# Altium PCB PCB.PcbDoc
Units mm, origin at the board's own origin, x right, y up, seen from the top; angles counter-clockwise.
Board outline 22.45 x 34 mm, 4 copper layers (Top Layer, Signal Layer 1, Signal Layer 2, Bottom Layer), stack 0.778 mm thick; 20 components, 8 nets, 60 pads, 29 vias.
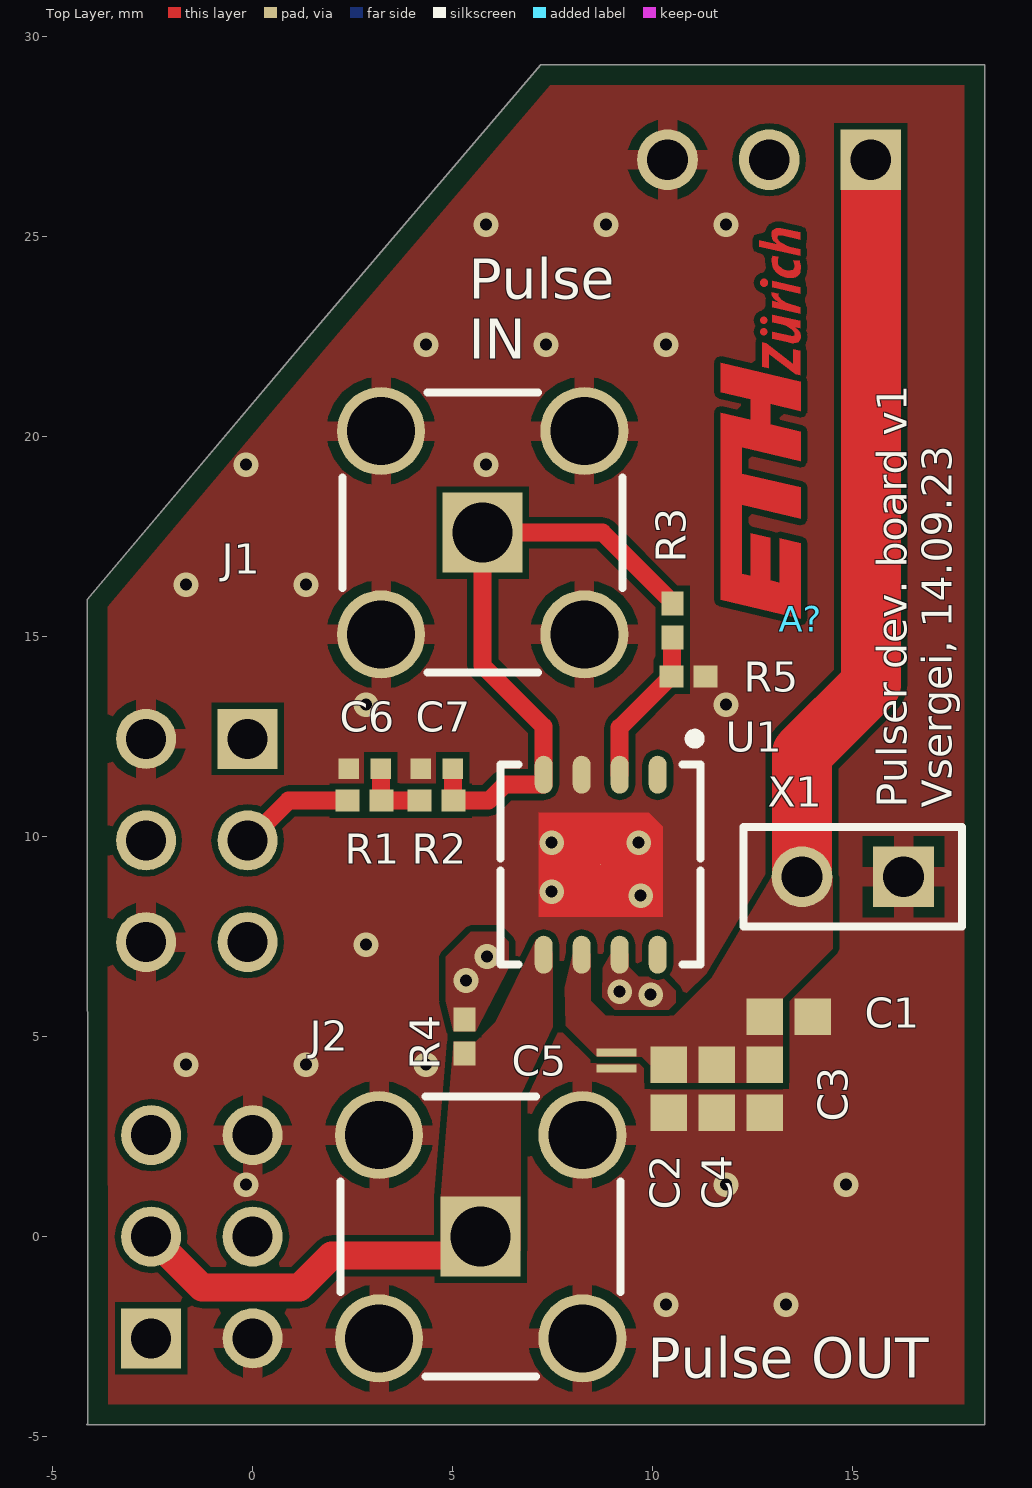
[diagram p0: Top Layer view]
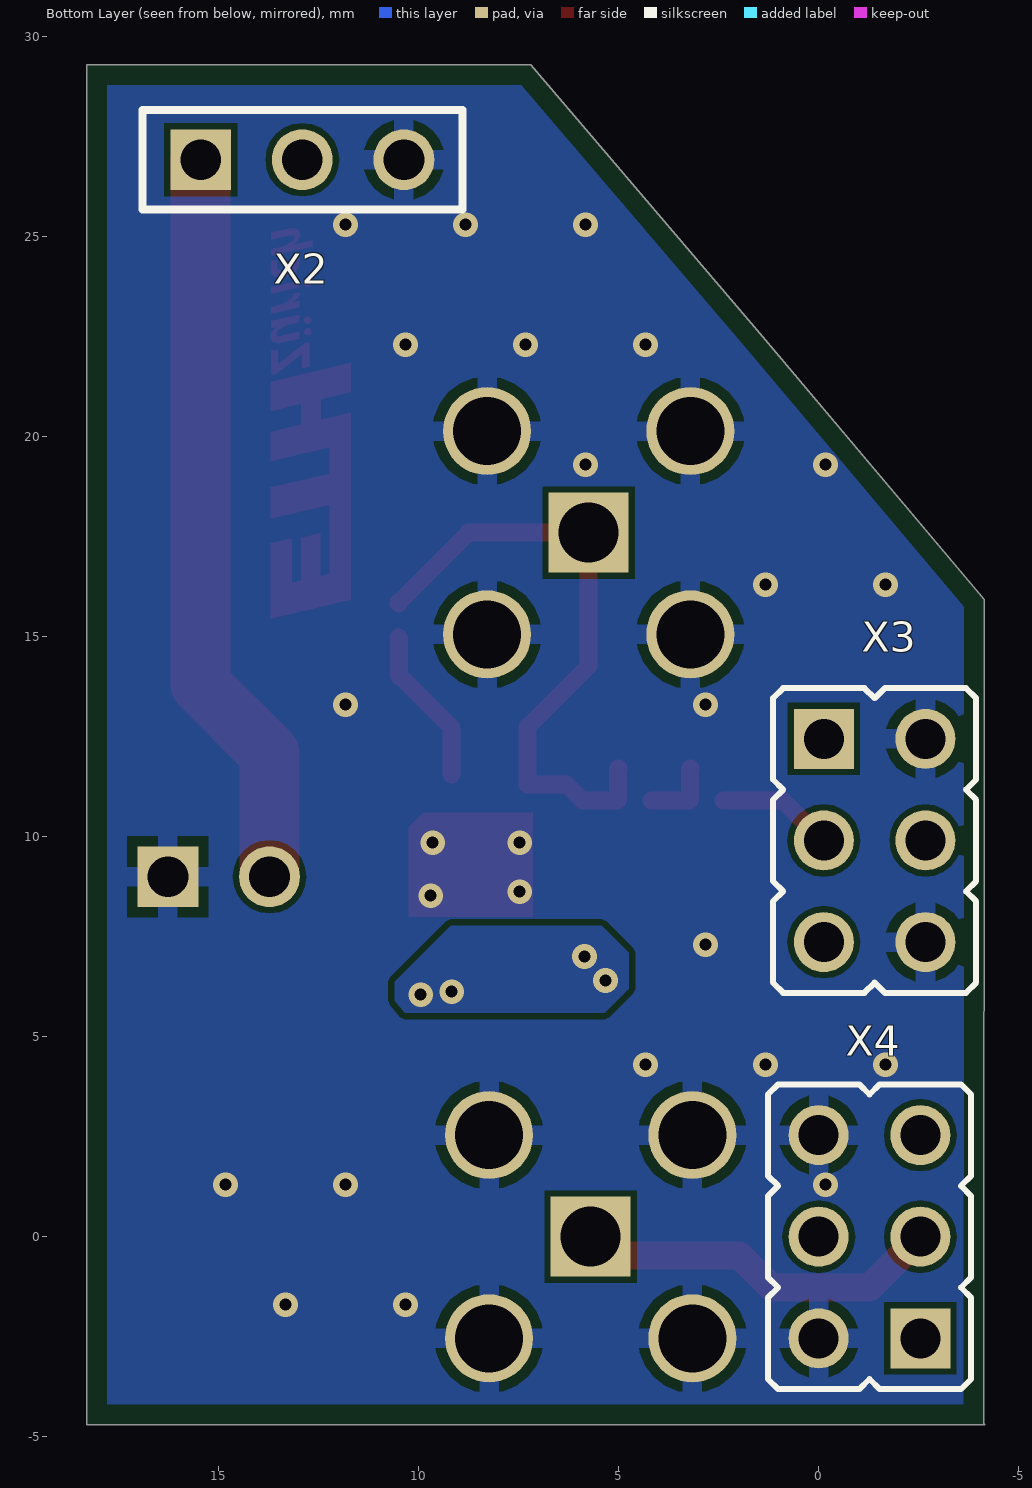
[diagram p1: Bottom Layer view, seen from below]
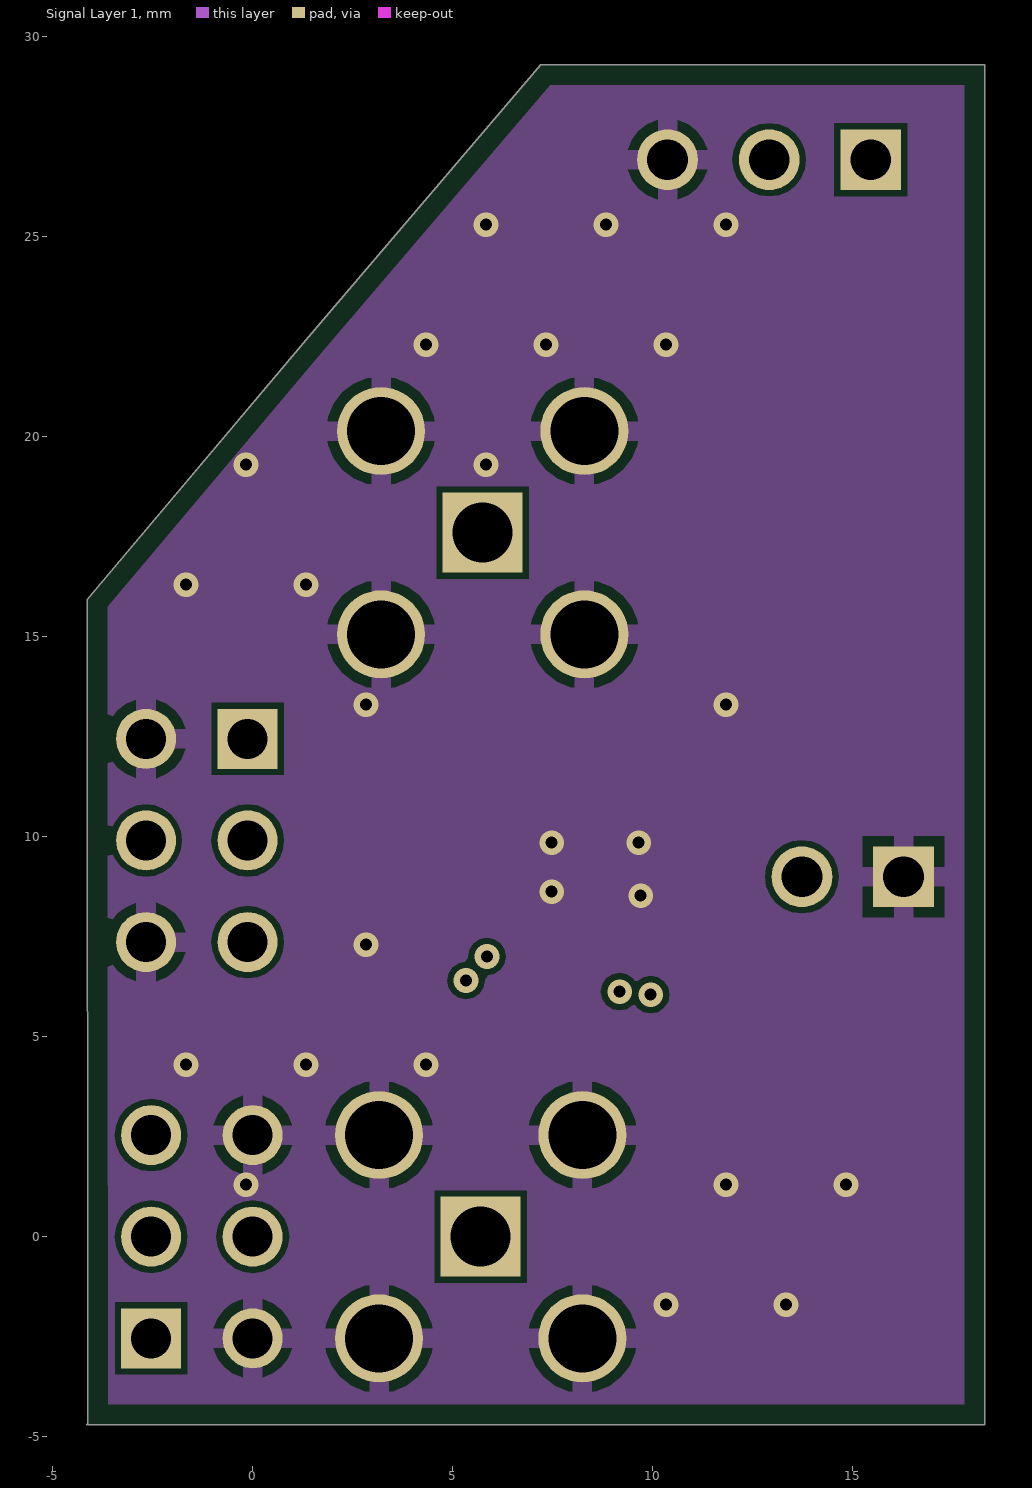
[diagram p2: Signal Layer 1]
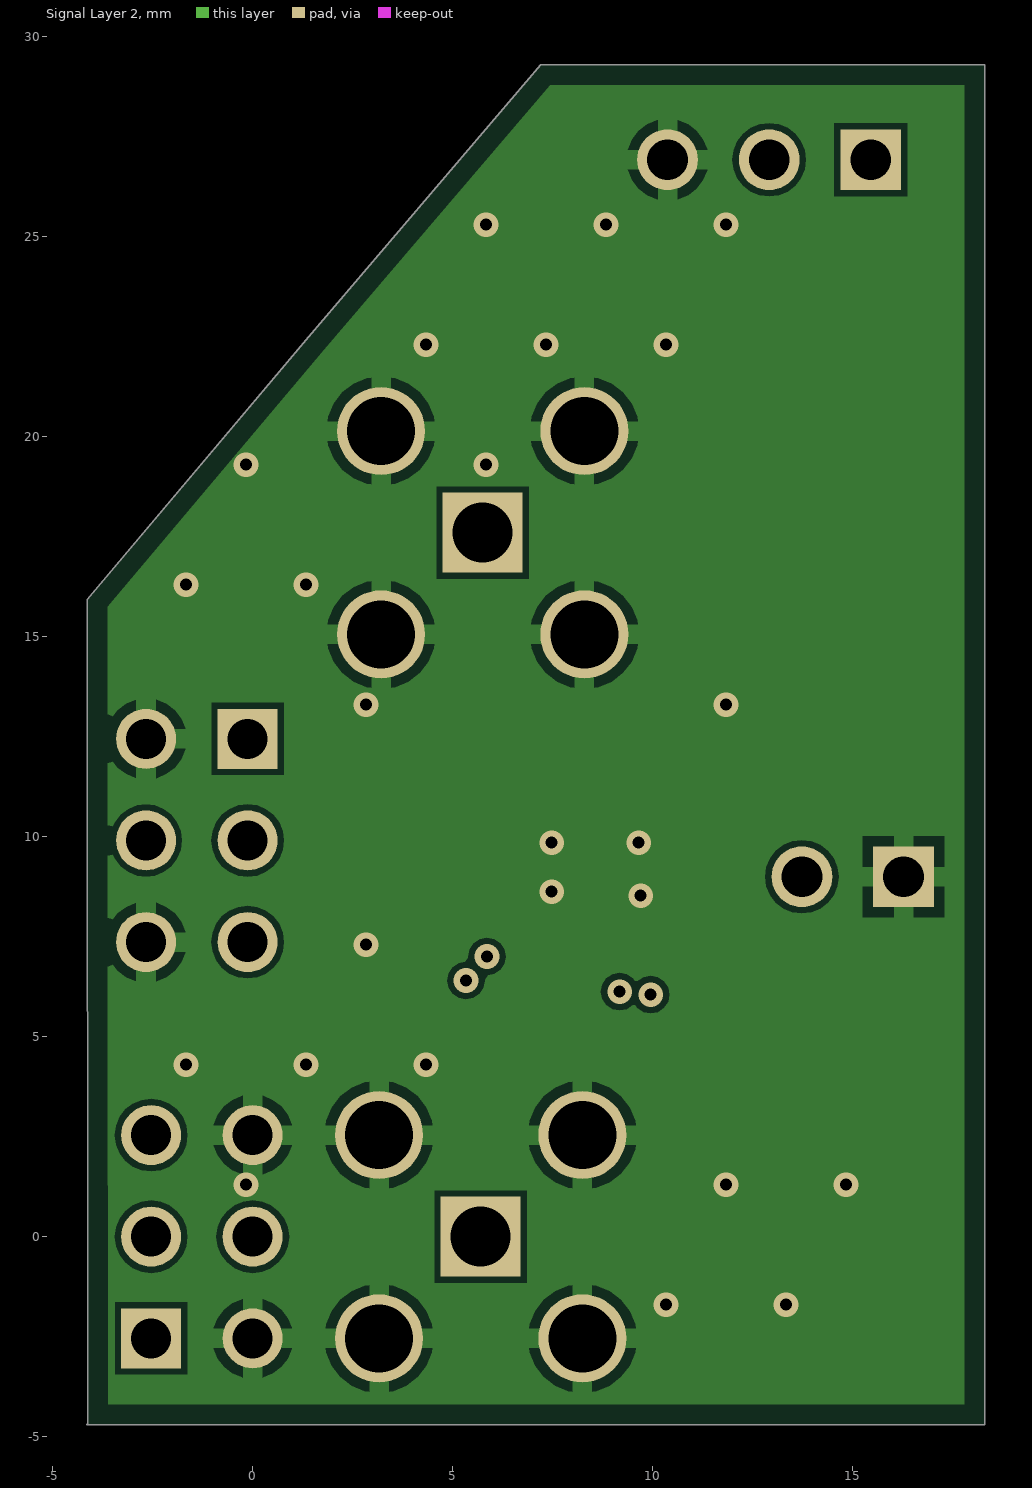
[diagram p3: Signal Layer 2]
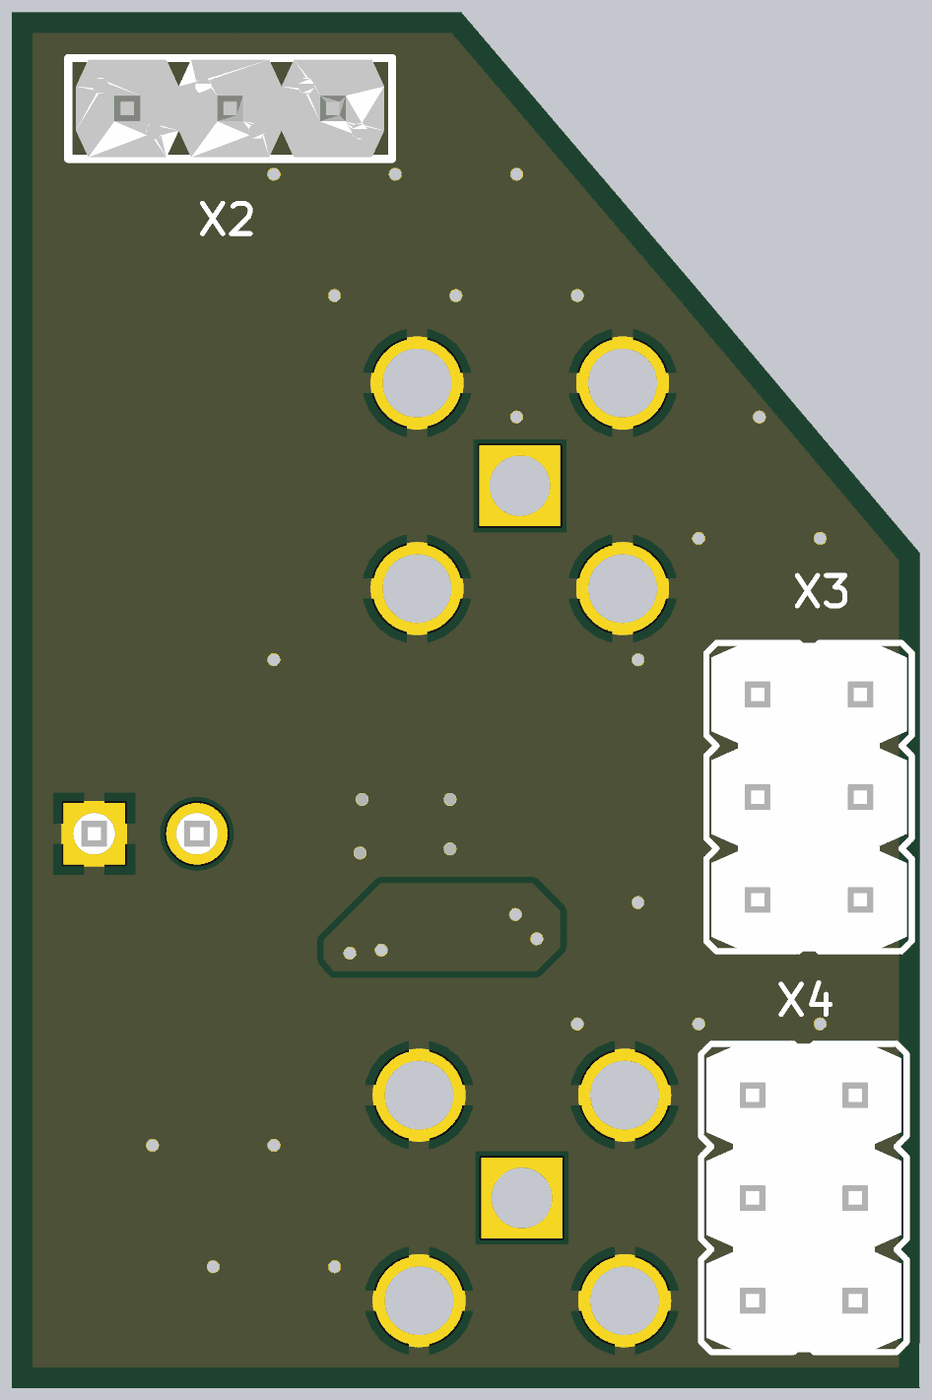
[diagram p4: 3D render of the assembled board from below, using the file's embedded part models]

## Layer stack, top to bottom
Top Solder: solder mask 0.0102, Solder Resist, Dk 3.5
Top Layer: signal copper 0.0356
Dielectric 1: core 0.254, FR-4, Dk 4.2
Signal Layer 1: signal copper 0.036
Dielectric 3: dielectric 0.127, Dk 4.2
Signal Layer 2: signal copper 0.036
Dielectric 2: core 0.254, FR-4, Dk 4.2
Bottom Layer: signal copper 0.0356
Bottom Solder: solder mask 0.0102, Solder Resist, Dk 3.5

## Board outline
-4.15,-4.7 -4.125,-4.675 -4.136,15.934 1.4,22.5 7.2,29.3 18.3,29.3 18.3,-4.7

## Design rules (kind name [scope] priority, off if disabled: settings)
BoardOutlineClearance [Not OnSilkscreen] p1: gap=0 ignorepadtopadclearanceinfootprint=FALSE except(0.5: Track-OutlineEdge Poly-OutlineEdge)
Clearance Clearance_50_Ohm [InNetClass('50 Ohm')] p1: gap=0.15 ignorepadtopadclearanceinfootprint=FALSE except(0: Arc-Hole Track-Hole SMDPad-Hole THPad-Hole Via-Hole Fill-Hole Poly-Hole Region-Hole Text-Hole; 0.7: Arc-Fill Arc-Poly Arc-Region Track-Fill Track-Poly Track-Region)
Clearance [All] p2: gap=0.15 ignorepadtopadclearanceinfootprint=FALSE except(0: Arc-Hole Track-Hole SMDPad-Hole THPad-Hole Via-Hole Fill-Hole Poly-Hole Region-Hole Text-Hole)
HoleSize [All] p1: absolutevalues=TRUE maxlimit=5 minlimit=0.3 maxpercent=80.000 minpercent=20.000
MinimumSolderMaskSliver [All] p1: minsoldermaskwidth=0.1
PlaneConnect [All] p1: pad.planeconnectstyle=Relief pad.reliefexpansion=0.508 pad.reliefentries=4 pad.reliefconductorwidth=0.254 pad.reliefairgap=0.254 via.planeconnectstyle=Direct via.reliefexpansion=0.508 via.reliefentries=4 via.reliefconductorwidth=0.254 via.reliefairgap=0.254
PolygonConnect PolygonConnect_GND [InNet('GND')] p1: thpad.connectstyle=Relief thpad.reliefconductorwidth=0.5 thpad.reliefentries=4 thpad.polygonreliefangle="90 Angle" thpad.airgapwidth=0.254 smdpad.connectstyle=Direct smdpad.reliefconductorwidth=0.254 smdpad.reliefentries=4 smdpad.polygonreliefangle="90 Angle" smdpad.airgapwidth=0.254 via.connectstyle=Direct via.reliefconductorwidth=0.254 via.reliefentries=4 via.polygonreliefangle="90 Angle" via.airgapwidth=0.254
PolygonConnect [All] p2: connectstyle=Direct reliefconductorwidth=0.254 reliefentries=4 polygonreliefangle="90 Angle" airgapwidth=0.254
RoutingVias [All] p1: holewidth=0.3 width=0.62 viastyle="Through Hole" minholewidth=0.3 minwidth=0.62 maxholewidth=0.3 maxwidth=0.62
SilkToSilkClearance [All] p1: silktosilkclearance=0.01
SilkToSolderMaskClearance [IsPad] p1: minsilkscreentomaskgap=0.01 clearancetoexposedcopper=TRUE
SolderMaskExpansion SolderMaskExpansion_1 [IsVia] p1: expansion=0.102 istentingtop=TRUE
SolderMaskExpansion [All] p2: expansion=0.05 istentingtop=FALSE
Width Width_50_Ohm [InNetClass('50 Ohm')] p1: maxlimit=0.35 minlimit=0.15 preferedwidth=0.35 toplayer_minwidth=0.25 midlayer1_maxwidth=0.15 midlayer1_prefwidth=0.15 midlayer2_maxwidth=0.15 midlayer2_prefwidth=0.15 bottomlayer_minwidth=0.25 minimp=50.000000 maximp=50.000000 favimp=50.000000
Width [All] p2: maxlimit=1.5 minlimit=0.15 preferedwidth=0.45 toplayer_minwidth=0.24 bottomlayer_minwidth=0.24 minimp=50.000000 maximp=50.000000 favimp=50.000000
25 further rules are at their usual default settings.

## Components (designator, comment, footprint, x,y, rotation, side; value= is the part's Value field where it differs from the comment)
A? "Logo ETH Zurich" eth-zurich_2mm 13.7,15.45 r90 top
C1 "10 uF" FP-GRM188-0_2-IPC_C 13.4,5.5 r0 top locked
C2 "10 uF" FP-GRM188-0_2-IPC_C 10.4,3.7 r270 top locked
C3 "10 uF" FP-GRM188-0_2-IPC_C 12.8,3.7 r270 top locked
C4 "10 uF" FP-GRM188-0_2-IPC_C 11.6,3.7 r270 top locked
C5 "47 nF" FP-CGAEA-MFG 9.1,4.4 r270 top locked
C6 "C0402C100J3GACTU" FP-C0402-BB-MFG 2.8,11.7 r180 top locked value="10 pF"
C7 "C0402C100J3GACTU" FP-C0402-BB-MFG 4.6,11.7 r180 top locked value="10 pF"
J1 "901-144-8RFX" AMPH-901-144-8RFX_V 5.75,17.6 r180 top locked
J2 "901-144-8RFX" AMPH-901-144-8RFX_V 5.7,0 r180 top locked
R1 "0 Ohm" RESC1005X40X25NL05T10 2.8,10.9 r180 top locked
R2 "0 Ohm" RESC1005X40X25NL05T10 4.6,10.9 r180 top locked
R3 "0 Ohm" RESC1005X40X25NL05T10 10.5,15.4 r270 top locked
R4 "0 Ohm" RESC1005X40X25NL05T10 5.3,5 r270 top locked
R5 "0 Ohm" RESC1005X40X25NL05T10 10.9,14 r0 top locked
U1 "IXDN602D2" IXDN602D2 8.7,9.3 r270 top locked
X1 "68000-102HLF" 68000-102HLF 15,9 r180 top locked
X2 "68000-103HLF" 68000-103HLF 12.911,26.924 r180 bottom locked
X3 "67996-106HLF" 67996-106HLF -1.397,9.906 r270 bottom locked
X4 "67996-106HLF" 67996-106HLF -1.27,0 r90 bottom locked

## Footprints (in the part's own frame and the unit in brackets; to place one, negate y for a bottom-side part, rotate by r counter-clockwise, add the part's x,y. Pads: shape width x height; smd on the part's side, far side on the other; paste and mask are expansions set on the pad)
67996-106HLF [mm] "Terminal Assembly, 2x3 Pin, Vertical, 2.54mm Pitch, Male"
  rect 1.5x1.5 hole 1: 1(-2.54,-1.27)
  round 1.5 hole 1: 2(-2.54,1.27) 3(0,-1.27) 4(0,1.27) 5(2.54,-1.27) 6(2.54,1.27)
  silkscreen extent -3.81,-2.54 3.81,2.54, body extent -3.81,-2.41 3.81,2.41, height 7.76
68000-102HLF [mm] "Terminal Assembly, 1x2 Pins, Vertical, 2.54mm Pitch, Male"
  rect 1.52x1.52 hole 1.02: 1(-1.27,0)
  round 1.52 hole 1.02: 2(1.27,0)
  silkscreen extent -2.73,-1.24 2.73,1.24, body extent -2.54,-1.21 2.54,1.21, height 8.39
68000-103HLF [mm] "Terminal Assembly, 3 Pin, Vertical, 2.54mm Pitch, Male"
  rect 1.52x1.52 hole 1.02: 1(-2.54,0)
  round 1.52 hole 1.02: 2(0,0) 3(2.54,0)
  silkscreen extent -4,-1.24 4,1.24, body extent -3.81,-1.21 3.81,1.21, height 8.39
AMPH-901-144-8RFX_V [mm] "THD, 5-Leads, Body 7x7mm, Pitch 2.54mm"
  rect 2x2 hole 1.5: 1(0,0)
  round 2.2 hole 1.7: 2(-2.54,2.54) 3(-2.54,-2.54) 4(2.54,-2.54) 5(2.54,2.54)
  silkscreen extent -3.5,-3.5 3.5,3.5, body extent -3.55,-3.55 3.55,3.55, height 9.53
eth-zurich_2mm [mm] "Logo ETH Zurich"
  Top Layer circle w0.18: c7.176,0.926 r0.001
  Top Layer circle w0.18: c7.462,0.926 r0.001
  Top Layer circle w0.2: c8.399,0.915 r0.001
  Top Layer region: 5.93,0 5.93,0 6.4,2 5.662,2 5.485,1.247 4.973,1.247 5.149,2 0.47,2 0,0 0.781,0 1.892,0 2.014,0.52 0.904,0.52 0.961,0.764 2.023,0.764 2.136,1.244 1.073,1.244 1.129,1.48 2.849,1.48 2.5,0 3.282,0 3.63,1.48 4.289,1.48 3.942,0 4.68,0 4.86,0.767 5.372,0.767 5.192,0
  Top Layer region: 6.906,0.96 6.906,0.96 6.301,0.96 6.264,0.794 6.63,0.794 6.115,0.123 6.092,0.016 6.696,0.016 6.733,0.182 6.366,0.182 6.883,0.856
  Top Layer region: 7.444,0.016 7.444,0.016 7.599,0.714 7.414,0.714 7.354,0.441 7.32,0.36 7.28,0.288 7.24,0.224 7.2,0.182 7.168,0.16 7.136,0.144 7.112,0.144 7.088,0.152 7.072,0.168 7.068,0.192 7.068,0.224 7.072,0.252 7.175,0.714 6.997,0.714 6.92,0.36 6.891,0.228 6.888,0.168 6.896,0.112 6.912,0.064 6.944,0.032 6.984,0.008 7.016,0 7.08,0 7.144,0.016 7.2,0.048 7.242,0.09 7.288,0.144 7.26,0.016
  Top Layer region: 7.905,0.52 7.905,0.52 7.948,0.714 7.784,0.714 7.629,0.016 7.793,0.016 7.818,0.129 7.856,0.252 7.9,0.36 7.936,0.428 7.986,0.494 8.02,0.528 8.048,0.548 8.076,0.56 8.096,0.56 8.123,0.553 8.16,0.72 8.136,0.724 8.112,0.724 8.088,0.72 8.052,0.704 8.028,0.688 7.996,0.66 7.968,0.632 7.936,0.584
  Top Layer region: 8.292,0.016 8.292,0.016 8.447,0.714 8.283,0.714 8.128,0.016
  Top Layer region: 9.076,0.701 9.076,0.701 9.04,0.714 9,0.72 8.936,0.72 8.864,0.714 8.788,0.696 8.724,0.664 8.672,0.624 8.64,0.592 8.608,0.552 8.58,0.504 8.56,0.456 8.54,0.4 8.528,0.348 8.52,0.296 8.52,0.228 8.528,0.168 8.54,0.128 8.56,0.088 8.584,0.056 8.616,0.032 8.652,0.016 8.688,0.008 8.768,0 8.808,0 8.88,0.008 8.925,0.019 8.944,0.024 8.961,0.181 8.924,0.168 8.872,0.156 8.832,0.152 8.804,0.152 8.772,0.16 8.744,0.176 8.728,0.192 8.716,0.216 8.708,0.244 8.704,0.272 8.704,0.308 8.712,0.36 8.728,0.412 8.748,0.456 8.772,0.492 8.808,0.536 8.84,0.556 8.872,0.568 8.904,0.572 8.952,0.572 8.996,0.568 9.016,0.564 9.044,0.556
  Top Layer region: 9.412,0.64 9.412,0.64 9.366,0.586 9.467,1.041 9.303,1.041 9.076,0.016 9.24,0.016 9.3,0.289 9.334,0.37 9.374,0.442 9.414,0.506 9.454,0.548 9.486,0.57 9.518,0.586 9.542,0.586 9.566,0.578 9.582,0.562 9.586,0.538 9.586,0.506 9.582,0.478 9.479,0.016 9.657,0.016 9.734,0.37 9.763,0.502 9.766,0.562 9.758,0.618 9.742,0.666 9.71,0.698 9.67,0.722 9.638,0.73 9.574,0.73 9.51,0.714 9.454,0.682
FP-C0402-BB-MFG [mm]
  rect 0.52x0.52 smd paste+0 mask+0: 1(-0.4,0) 2(0.4,0)
  body extent -0.8,-0.4 0.8,0.4, height 0.25
FP-CGAEA-MFG [mm]
  rect 0.2x1 smd paste+0 mask+0: 1(-0.2,0) 2(0.2,0)
  body extent -0.4,-0.63 0.4,0.63, height 0.25
FP-GRM188-0_2-IPC_C [mm]
  rect 0.905x0.906 smd paste+0 mask+0: 1(-0.601,0) 2(0.601,0)
  body extent -1.15,-0.6 1.15,0.6, height 0.25
IXDN602D2 [mm] "DFN, 8-Leads"
  oval 0.95x0.45 smd: 1(-2.25,1.425) 2(-2.25,0.475) 3(-2.25,-0.475) 4(-2.25,-1.425) 5(2.25,-1.425) 6(2.25,-0.475) 7(2.25,0.475) 8(2.25,1.425)
  round 0.025 smd: 9(0,0)
  Top Layer region: -1.3,1.2 -0.95,1.55 1.3,1.55 1.3,-1.55 -1.275,-1.55 -1.3,-1.55
  silkscreen extent -3.27,-2.5 2.5,2.5, body extent -2.5,-2 2.5,2, height 1
RESC1005X40X25NL05T10 [mm] "Chip Resistor, 2-Leads, Body 1.00x0.50mm, IPC Medium Density"
  rect 0.6x0.55 smd: 1(-0.425,0) 2(0.425,0)
  body extent -0.53,-0.27 0.53,0.28, height 0.4

## Part data
A?: library part CMP-00038-1
C1 C2 C3 C4: library part CMP-06035-042125-1, "Chip Multilayer Ceramic Capacitors for General Purpose, 0603, 2.2uF, X5R, 15%, 10%, 50V GRM188R61H225KE11D", Capacitance=2.2uF, Case Code (Imperial)=0603, Case Code (Metric)=1608, Dielectric=X5R, Max Operating Temperature=85°C, Min Operating Temperature=-55°C, Tolerance=10%, Voltage Rating=50V, Case/Package=0603, Height=0.8mm, Length=0.063inch, Material=Ceramic, Mount="Surface Mount", Packaging="Cut Tape", REACH SVHC="No SVHC", Thickness=0.039inch, Voltage Rating (DC)=50V, Width=0.031inch
C5: library part CMP-08246-002687-1, "CAP CER 0.047UF 50V X7R 0204  CGAEA1X7R1H473M030BC", RoHS Compliant=No
C6 C7: library part CMP-1034-00716-4, "CAP CER 10PF 25V 5% NP0 0402", Capacitance="10 pF", Manufacturer=Kemet, Package=C0402-BB, Temperature="-55°C to +125°C", Temperature Characteristic=C0G, Temperature Coefficient=15%, Temperature Range High=+125°C, Temperature Range Low=-55°C, Tolerance=0.05, Voltage Rating="25 V", Automotive=No, Category=Cap, ComponentLink2Description=Datasheet, ComponentLink2URL=https://content.kemet.com/datasheets/KEM_C1002_X7R_SMD.pdf, Device Class L1="Passive Components", Device Class L2=Capacitors, Device Class L3="Ceramic Capacitors", Digikey Description="CAP CER 10PF 25V 5% NP0 0402", Height=0.55mm, Ipc Land Pattern Name=CAPC10050X50, Lead Free=Yes, Manufacturer Part Number=C0402C100J3GACTU, Material=Ceramic, Mouser Description="Multilayer Ceramic Capacitors MLCC - SMD/SMT 25volts 10pF C0G 5%", Octopart=https://octopart.com/c0402c100j3gactu-kemet-9138549, RoHS=TRUE
J1 J2: library part CMP-2000-05706-1, "Coaxial Connector, 18 GHz, 50 Ohm, -65 to 165 degC, 5-Pin THD, RoHS, Bulk", Dielectric Material=Polytetrafluoroethylene(PTFE), Frequency - Max=18GHz, Housing Color=Gold, Manufacturer=Amphenol, Operating Temperature=-65°C~165°C, Package Description="5-Pin Through Hole Device, Body 7 x 7 mm, Pitch 2.54 mm", Standard Package=1, Voltage Rating=-, 3D Model=901-144-8RFX.igs, Body Finish=Gold, Body Material=Brass, Cable Group=-, Category=Connectors,Interconnects, Center Contact Material=BerylliumCopper, Center Contact Plating=Gold, Connector Style=SMA, Connector Type=Jack,FemaleSocket, Contact Termination=Solder, Datasheet URL=https://datasheet.ciiva.com/23676/c901-144-8rfx-23676337.pdf, Datasheet Version="Rev. A, 01/2001", Family=CoaxialConnectors(RF), Fastening Type=Threaded, Features=-, Impedance=50Ohm, Ingress Protection=-, Manufacturer URL=http://www.amphenol.com/, Mounting Technology=SurfaceMount, Mounting Type=ThroughHole, Online Catalog=SMA,RFX, Other Names=901-144-8-RFX9011448RFXARFX1231, Package Reference=901-144-8RFX, Packaging=Bulk, Series=-, Shield Termination=Solder
R1 R2 R3 R4 R5: library part CMP-1011-00001-2, Manufacturer="Yageo / Phycomp", Part Number=RC0402JR-070RL
U1: "IXD_602 / 2-Ampere Dual Low-Side / Ultrafast MOSFET Drivers"
X1: library part CMP-00100-3, Case/Package=100, Colour=Black, Current Rating=3A, Flammability Rating="UL94 V-0", Insulation Resistance=5GR, Manufacturer="Amphenol FCI", Max Operating Temperature=125°C, Max Voltage Rating (AC)=1.5kV, Min Operating Temperature=-65°C, Supplier Part Number=609-3500-ND, ComponentLink1Description=68000-274228-5149165.pdf, ComponentLink1URL=https://datasheet.ciiva.com/5149/68000-274228-5149165.pdf, ComponentLink2Description=68000-722084.pdf, ComponentLink2URL=https://datasheet.ciiva.com/722/68000-722084.pdf, ComponentLink3Description=68000-10149324.pdf, ComponentLink3URL=https://datasheet.ciiva.com/10149/68000-10149324.pdf, ComponentLink4Description=68000-16726309.pdf, ComponentLink4URL=https://datasheet.ciiva.com/16726/68000-16726309.pdf, Connector Type="Male Pin", Contact Gender=Male, Contact Material=Bronze, Contact Mating Length=0.23inch, Contact Plating=Nickel,Gold,GXT, Depth=2.41mm, Gender=Male, Housing Colour=Black, Housing Material=Thermoplastic, Lead Free="Lead Free", Length=5.08mm, Manufacturer Part Number=68000-102HLF, Mating Post Length=5.84mm, Number of Contacts=2, Number of Positions=2, Number of Rows=1, Orientation=Straight, Package Quantity=100, Packaging=Bulk, Pitch=2.54mm, Radiation Hardening=No, Supplier=Digikey, Termination=Solder, Termination Post Length=2.41mm, Voltage Rating=1.5kV, Voltage Rating (DC)=1.5kV
X2: library part CMP-00101-2, "3 Positions Header, Unshrouded Connector 0.100\" (2.54mm) Through Hole Gold or Gold, GXT™", Color=Black, Current Rating=3A, Flammability Rating="UL94 V-0", Insulation Resistance=5GR, Manufacturer="Amphenol FCI", Max Operating Temperature=125°C, Max Voltage Rating (AC)=1.5kV, Min Operating Temperature=-65°C, Package Quantity=100, Supplier Part Number=609-3461-ND, ComponentLink1Description=68000-274283-5157301.pdf, ComponentLink1URL=https://datasheet.ciiva.com/5157/68000-274283-5157301.pdf, ComponentLink2Description=68000-731071.pdf, ComponentLink2URL=https://datasheet.ciiva.com/731/68000-731071.pdf, ComponentLink3Description=68000-10149754.pdf, ComponentLink3URL=https://datasheet.ciiva.com/10149/68000-10149754.pdf, ComponentLink4Description=1914865-46392021.pdf, ComponentLink4URL=https://datasheet.ciiva.com/46392/1914865-46392021.pdf, Connector Type="Header, Unshrouded", Contact Finish="Gold or Gold, GXT™", Contact Finish Thickness="15µin (0.38µm)", Contact Gender=Male, Contact Material=Bronze, Contact Mating Length="0.230\" (5.84mm)", Contact Plating=Nickel,Gold,GXT, Contact Type="Male Pin", Depth=2.41mm, Fastening Type=-, Features=-, Housing Colour=Black, Housing Material=Thermoplastic, Length=7.62mm, Manufacturer Part Number=68000-103HLF, Mounting Type="Through Hole", Number of Contacts=3, Number of Positions=3, Number of Rows=1, Orientation=Straight, Packaging=Bulk, Pitch=2.54mm, Radiation Hardening=No, REACH SVHC="No SVHC", Supplier=Digikey, Termination=Solder, Termination Post Length=2.41mm, Voltage Rating=1.5kV
X3 X4: library part CMP-00150-2, "6 Positions Header, Unshrouded Connector 0.100\" (2.54mm) Through Hole Gold or Gold, GXT™", Case/Package=100, Colour=Black, Current Rating=3A, Flammability Rating="UL94 V-0", Insulation Resistance=5GR, Manufacturer="Amphenol FCI", Max Operating Temperature=125°C, Max Voltage Rating (AC)=1.5kV, Min Operating Temperature=-65°C, Supplier Part Number=609-3202-ND, ComponentLink1Description=67996-16726269.pdf, ComponentLink1URL=https://datasheet.ciiva.com/16726/67996-16726269.pdf, ComponentLink2Description=1876884-46393071.pdf, ComponentLink2URL=https://datasheet.ciiva.com/46393/1876884-46393071.pdf, ComponentLink3Description=67996-728918.pdf, ComponentLink3URL=https://datasheet.ciiva.com/728/67996-728918.pdf, ComponentLink4Description=67996-10149181.pdf, ComponentLink4URL=https://datasheet.ciiva.com/10149/67996-10149181.pdf, Connector Type="Male Pin", Contact Gender=Male, Contact Material=Bronze, Contact Mating Length=0.23inch, Contact Plating=Nickel,Gold,GXT, Depth=4.83mm, Gender=Male, Housing Colour=Black, Housing Material=Thermoplastic, Length=7.62mm, Manufacturer Part Number=67996-106HLF, Mating Post Length=5.84mm, Number of Contacts=6, Number of Positions=6, Number of Rows=2, Orientation=Straight, Package Quantity=100, Packaging=Bulk, Pitch=2.54mm, Radiation Hardening=No, REACH SVHC="No SVHC", Row Spacing=0.1inch, Supplier=Digikey, Termination=Solder, Termination Post Length=2.41mm, Voltage Rating=1.5kV

## Via types
v1: diameter 0.62, hole 0.3, Top Layer to Bottom Layer, tented both sides, 29 vias

## Nets (pads, with @x,y where several pads share a name; then routed paths per layer and width w, separated by ;. In a path a pad name is that pad's centre, name@x,y a point inside that pad or via, vN(x,y) a via of type N, cw(c..) or ccw(c..) an arc to the next point about the centre after c; other vN are vias at no path point)
GND: C1.2 C2.2 C3.2 C4.2 C5.2 C6.2 C7.2 J1.2 J1.3 J1.4 J1.5 J2.2 J2.3 J2.4 J2.5 R5.2 U1.3 U1.9 X1.1 X2.3 X3.2 X3.6 X4.2 X4.6
  other v1: 10.33,-1.7 13.33,-1.7 -0.17,1.3 11.83,1.3 14.83,1.3 -1.67,4.3 1.33,4.3 4.33,4.3 2.83,7.3 9.7,8.525 7.475,8.625 7.475,9.85 9.65,9.85 2.83,13.3 11.83,13.3 -1.67,16.3 1.33,16.3 -0.17,19.3 5.83,19.3 4.33,22.3 7.33,22.3 10.33,22.3 5.83,25.3 8.83,25.3 11.83,25.3
NetC6_1: C6.1 R1.1 R2.2 | length 1.8
  Top Layer w0.45: C6.1 3.213,11.687 3.213,10.913 R1.1 R2.2
NetR3_2: R3.2 R5.1 U1.2 | length 4
  Top Layer w0.45: U1.2 9.175,12.725 10.45,14 R5.1 10.487,14.012 10.487,14.962 R3.2
NetR4_1: R4.1 U1.7
  other v1: 9.95,6.05 9.175,6.125 5.331,6.404 5.856,7.004
PULSE_IN_3V3: R1.2 X3.3 | length 2.9
  Top Layer w0.45: X3.3 -0.1,9.906 0.894,10.9 R1.2
PULSE_IN_3V3_FILT: C7.1 J1.1 R2.1 R3.1 U1.4 | length 15.7
  Top Layer w0.45: C7.1 5.013,11.687 5.013,10.913 R2.1 5.9,10.9 6.3,11.3 7.275,11.3 7.275,12.75 5.75,14.275 J1.1 8.75,17.6 10.5,15.85 R3.1
PULSE_OUT_HV: J2.1 R4.2 U1.5 X4.3 | length 9.3
  Top Layer w0.45: J2.1@5.225,-0.475 J2.1
  Top Layer w0.7: X4.3 -1.265,-1.275 1.175,-1.275 1.975,-0.475 J2.1@5.225,-0.475
VCC: C1.1 C2.1 C3.1 C4.1 C5.1 U1.6 X1.2 X2.1 | length 18.6
  Top Layer w1.5: X1.2 13.73,12.08 15.451,13.801 X2.1
pads on no net: U1.1 U1.8 X2.2 X3.1 X3.4 X3.5 X4.1 X4.4 X4.5

## Polygon pours and split planes (outlines as drawn)
GND on Top Layer "GND_L01_P018" (solid, pour order 18): -4.67,-4.7 -4.67,15.3 1.4,22.5 7.2,29.3 18.3,29.3 18.3,-4.7
NetR4_1 on Top Layer "NETR4_1_L01_P014" (solid, pour order 14): 8.95,7.075 8.75,6.725 8.737,5.988 9.05,5.675 10.4,5.675 10.575,5.85 10.575,6.15 10.225,6.5 9.65,6.5 9.4,6.75 9.4,7.075
NetR4_1 on Top Layer "NETR4_1_L01_P015" (solid, pour order 15): 5.025,5.125 5.014,5.136 4.825,5.9 4.825,7 5.45,7.625 6.15,7.625 6.4,7.375 6.4,6.725 5.575,5.136
PULSE_OUT_HV on Top Layer "PULSE_OUT_HV_L01_P016" (solid, pour order 16): 7.5,7.075 7.5,5.25 6.7,3.55 6.7,-0.35 6.275,-0.775 5.175,-0.775 4.7,-0.3 4.7,1 5.025,4.875 5.575,4.875 6.075,5.375 7.075,7.425 7.425,7.425
VCC on Top Layer "VCC_L01_P017" (solid, pour order 17): 8,7.075 7.8,6.225 7.825,5.275 8.6,4.5 9.725,4.5 9.95,4.275 9.95,3.85 13.25,3.85 13.25,5.95 14.5,7.2 14.5,9 12.975,9 11.475,6.475 10.525,5.525 8.825,5.525 8.45,5.9 8.45,7.075
GND on Bottom Layer "GND_L04_P020" (solid, pour order 20): -4.67,-4.7 -4.67,15.3 1.4,22.5 7.2,29.3 18.3,29.3 18.3,-4.7
NetR4_1 on Bottom Layer "NETR4_1_L04_P019" (solid, pour order 19): 10.35,5.6 5.35,5.6 4.75,6.2 4.75,7.1 5.425,7.775 9.2,7.775 10.6,6.375 10.6,5.9
GND on Signal Layer 1 "GND_L02_P021" (solid, pour order 21): -4.67,-4.7 -4.67,15.3 1.4,22.5 7.2,29.3 18.3,29.3 18.3,-4.7
GND on Signal Layer 2 "GND_L03_P022" (solid, pour order 22): -4.67,-4.7 -4.67,15.3 1.4,22.5 7.2,29.3 18.3,29.3 18.3,-4.7

## Silkscreen, mask and mechanical layers (free items; w line width, h text height)
Top Overlay:
  text "Pulse / IN" at 5.4,21.95 h1
  text "Pulser dev. board v1 / Vsergei, 14.09.23" at 17.475,10.725 h0.75 r90
  text "Pulse OUT" at 9.875,-3.525 h1